# EAGLE board untitled (EAGLE 9.6.2)
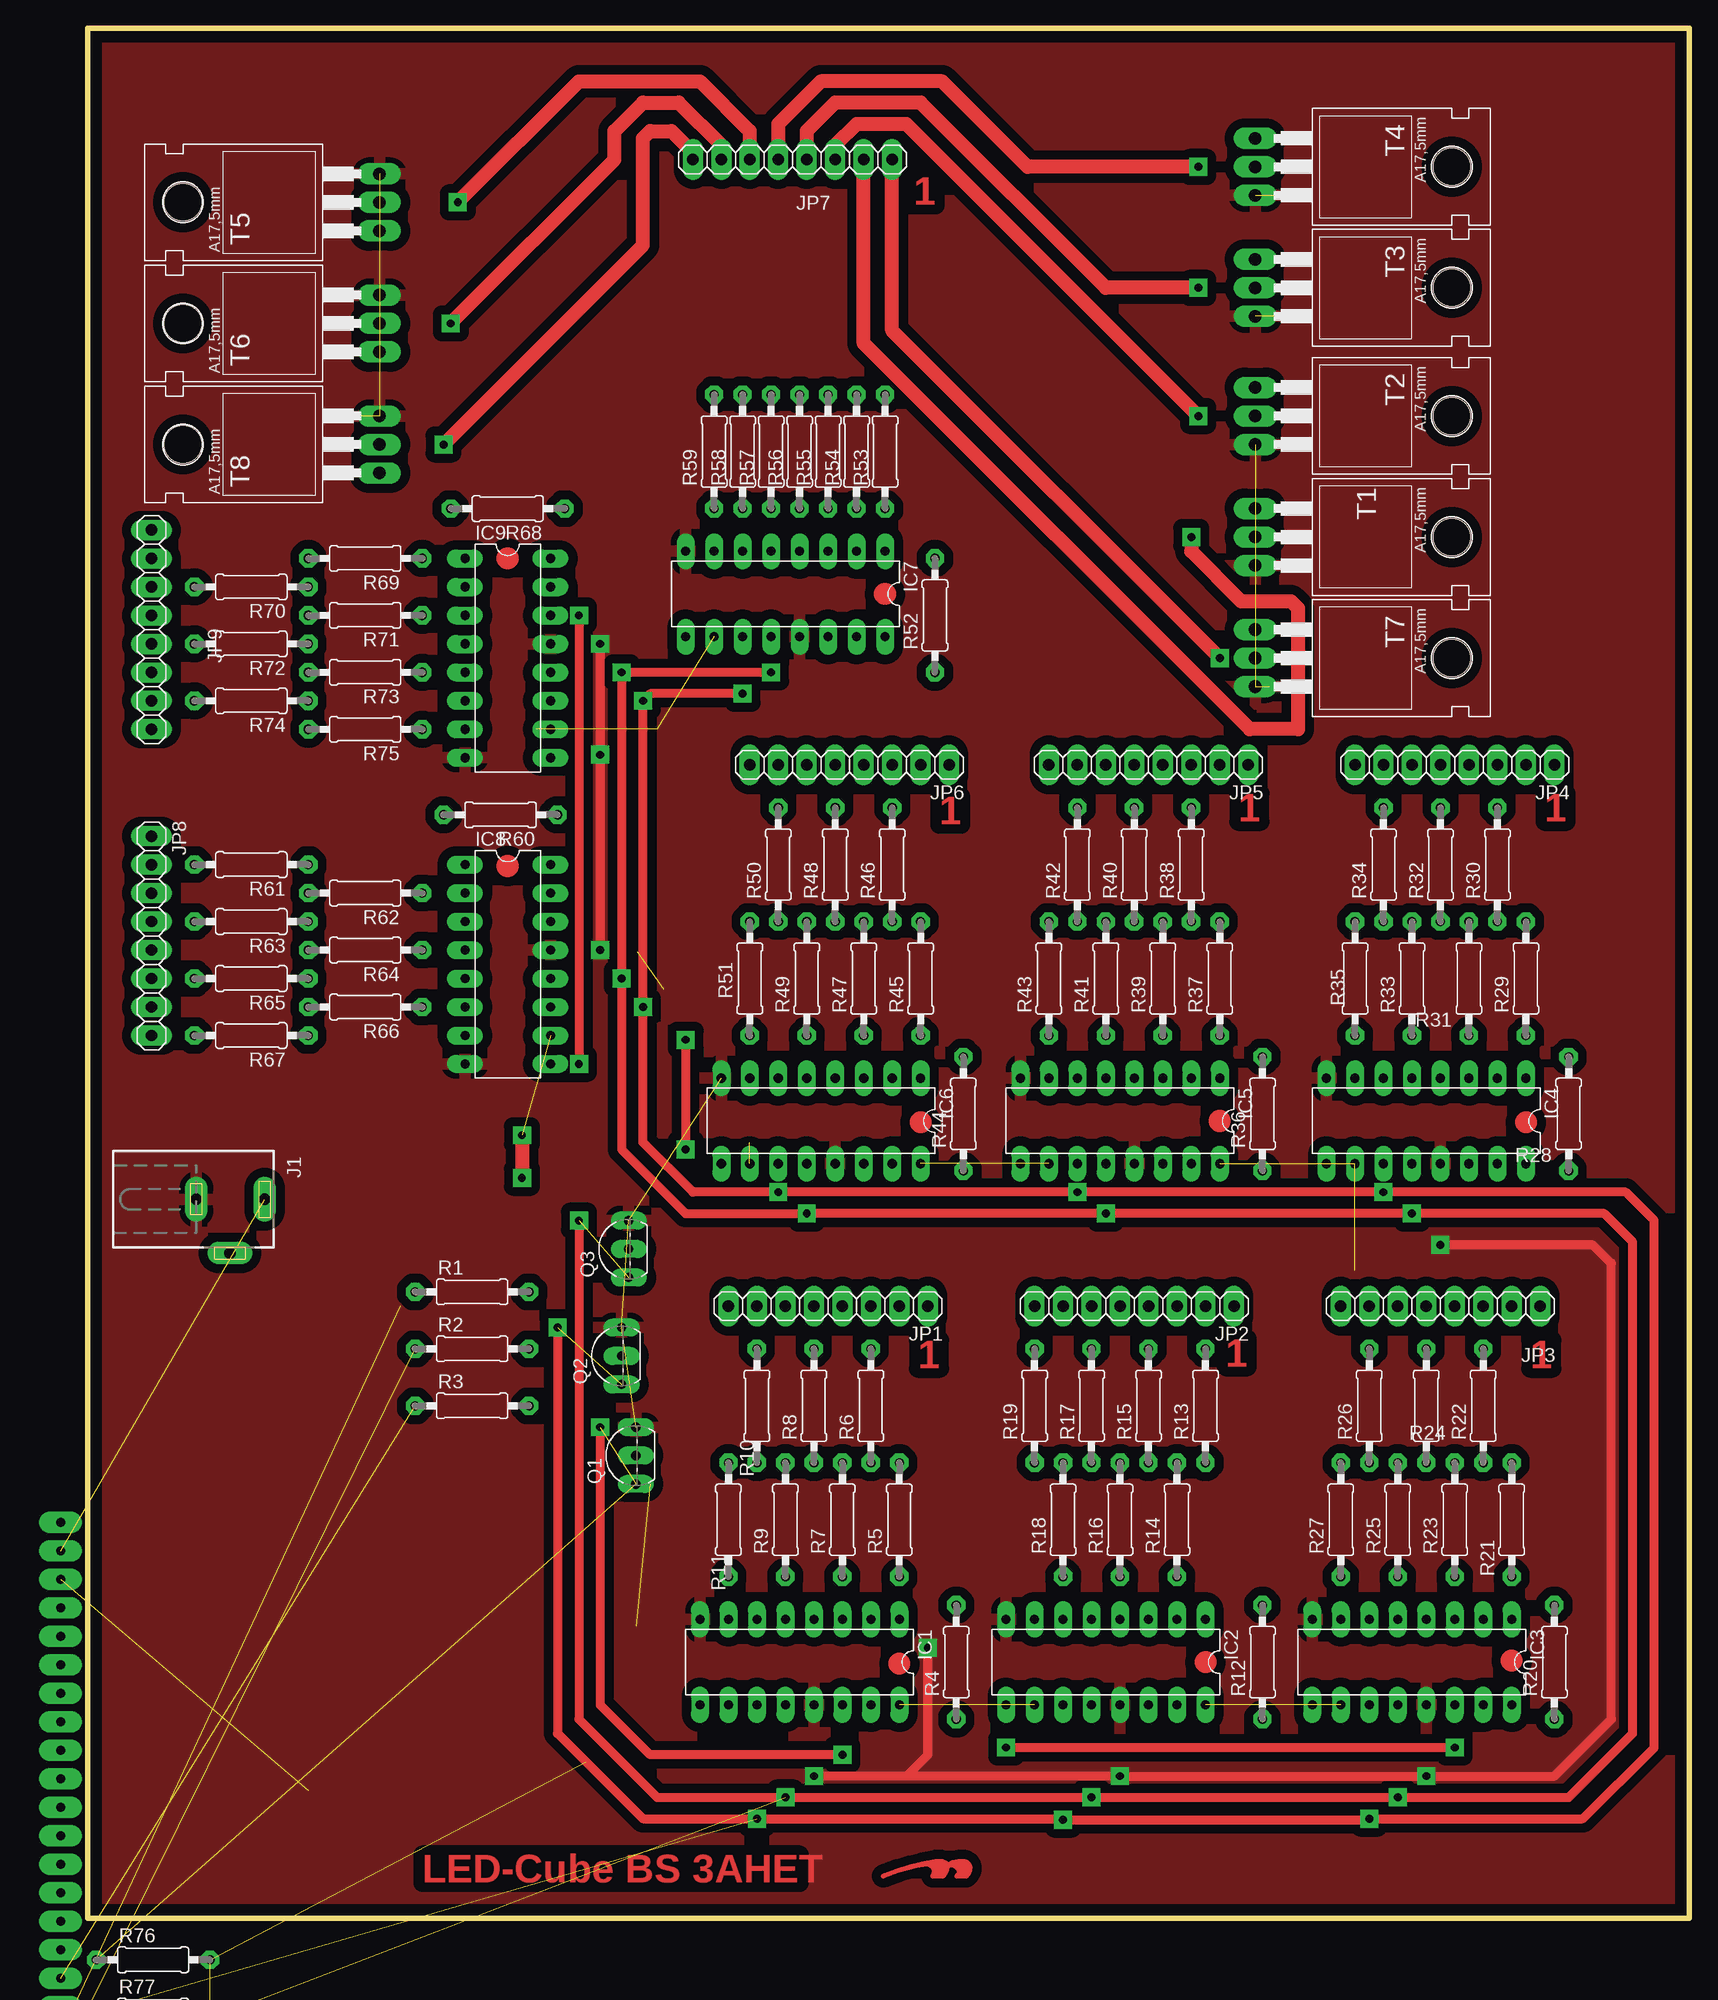
[diagram p0: board, top side]
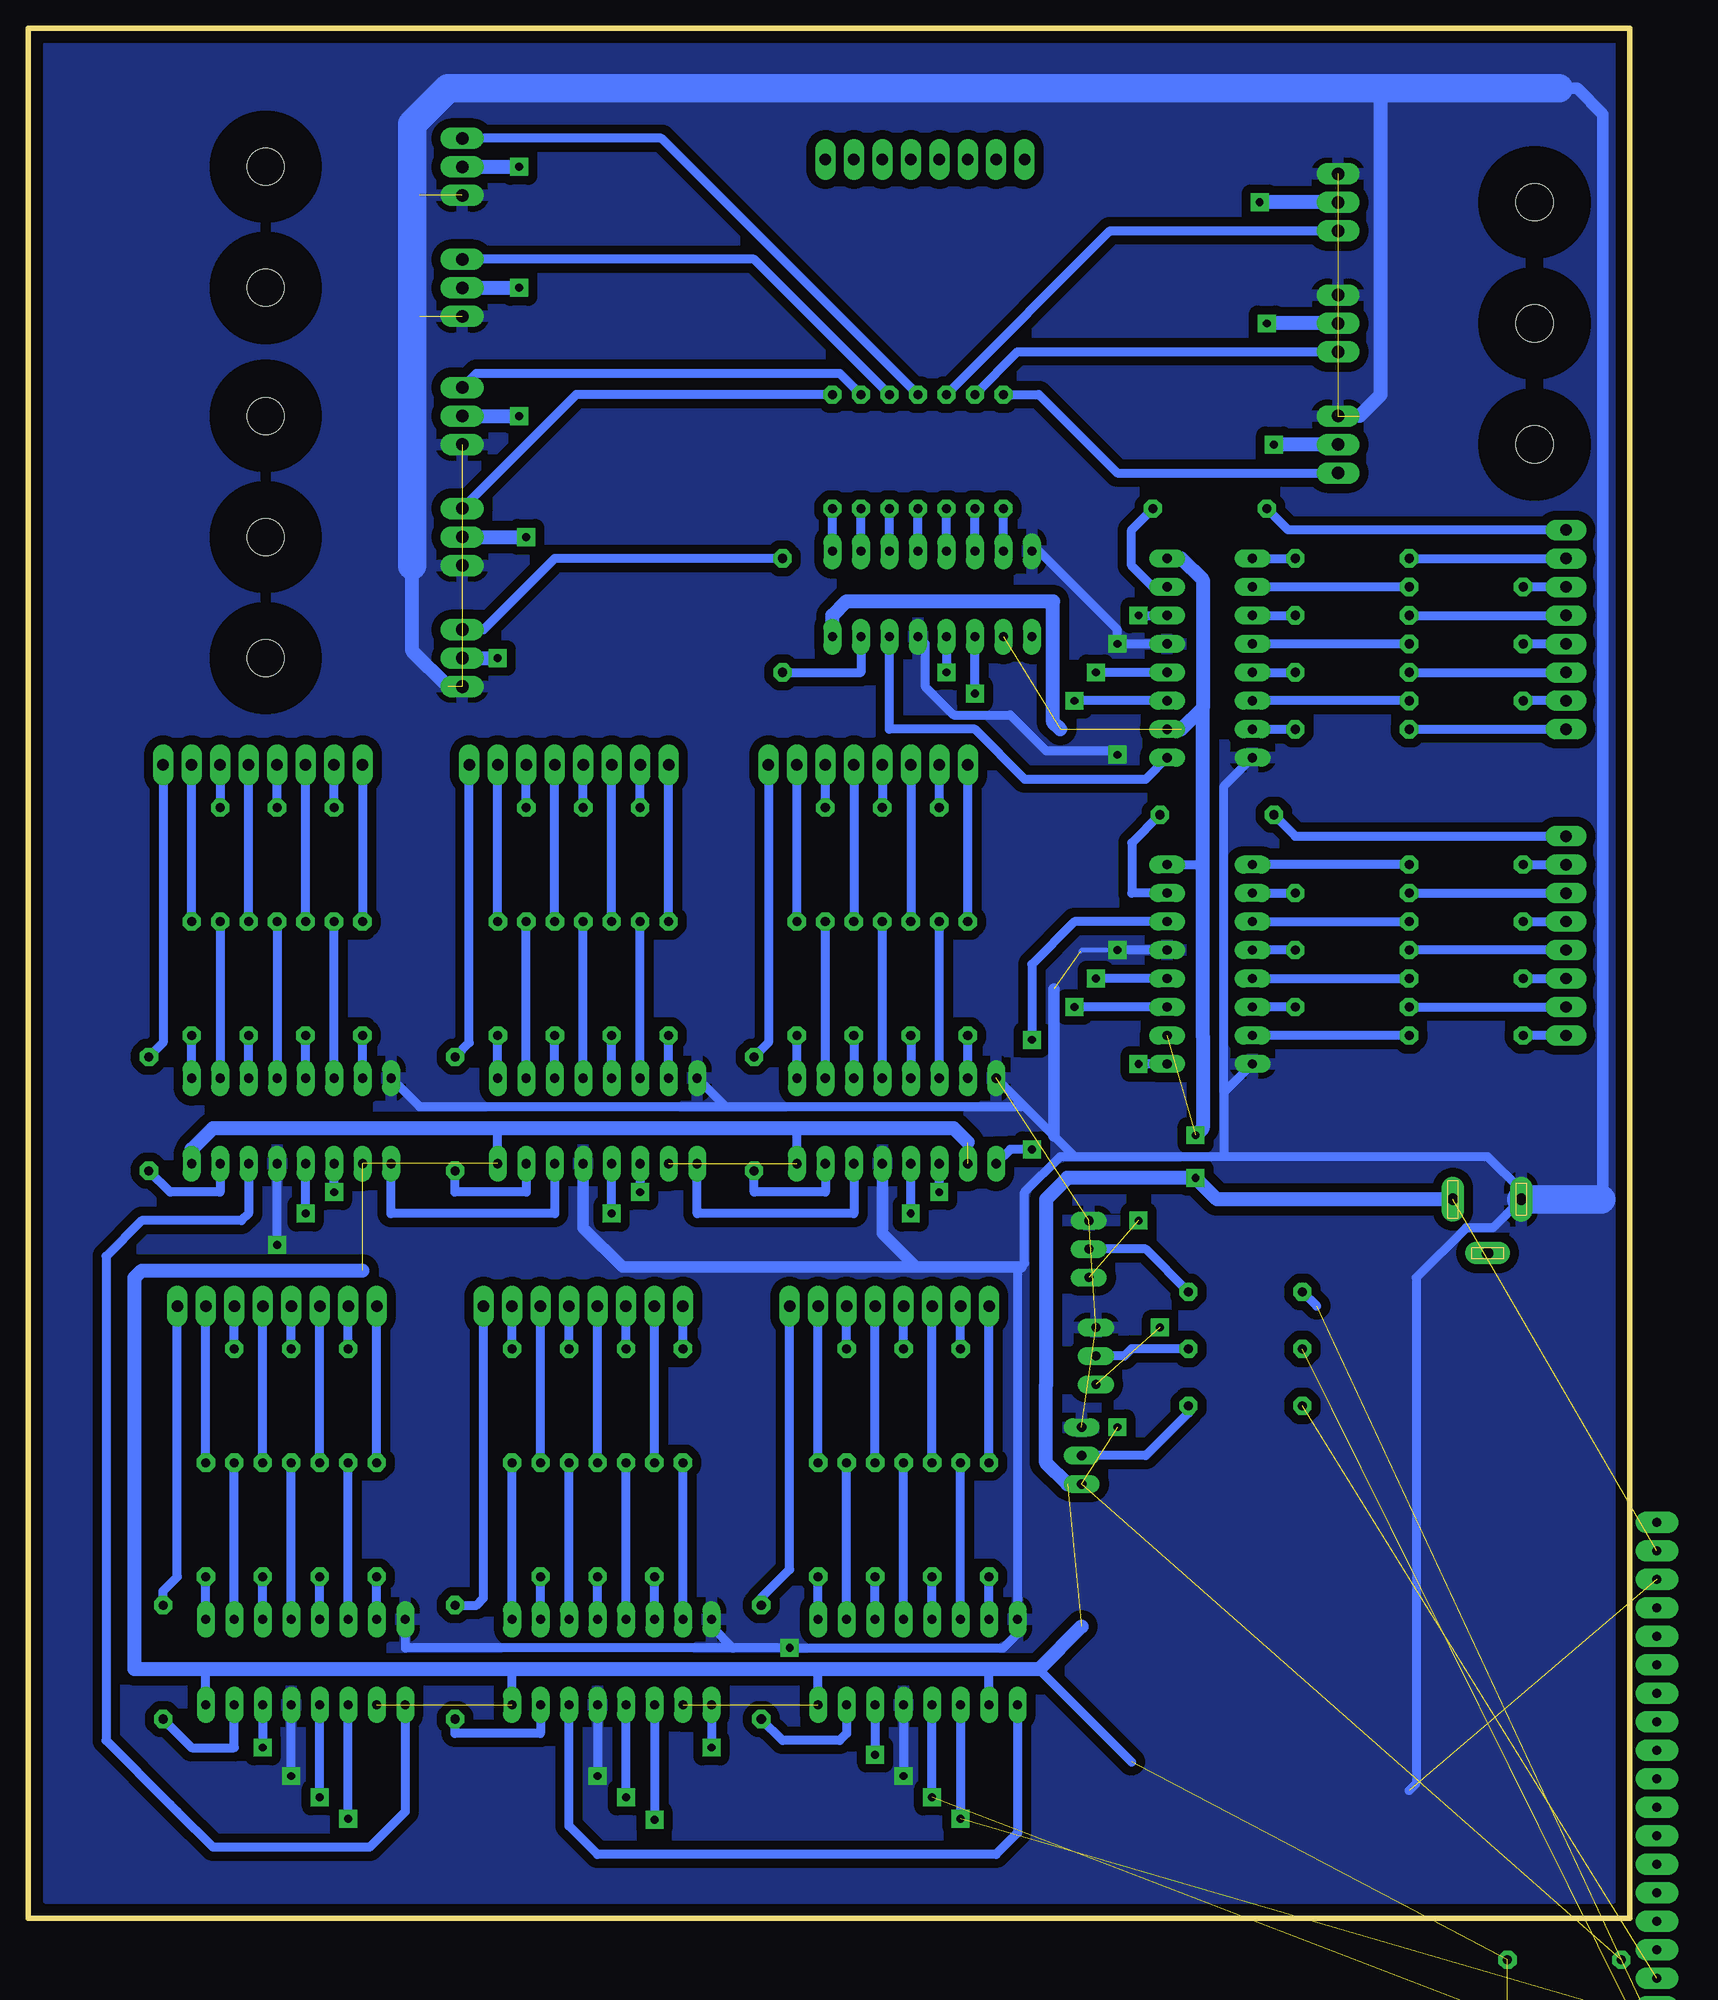
[diagram p1: board, bottom side, seen from below]

Size 142.85 x 168.58 mm. Coordinates in mm from the lower left corner, seen from the top.
Outline: 0,0 142.85,0 142.85,168.58 0,168.58 0,0
Copper layers (1*16): Top 0.035mm / dielectric 1.5mm / Bottom 0.035mm
Design rules "htl-klu": minimum track width 16mil, minimum drill 0.35mm, track to track 16mil, track to pad 16mil, pad to pad 16mil, via to via 16mil, smd to smd 6mil, copper to edge 40mil, drill to drill 6mil, minimum pad ring 16mil, minimum via ring 8mil, stop-mask expansion 4mil, vias tented up to drill 0mil, thermal gap 20mil

## Footprints (pad centres in the part's own frame; a part is rotated, then mirrored left to right if it is on the bottom)
DIL16 = drill 0.813 long: 1 -8.89,-3.81; 2 -6.35,-3.81; 3 -3.81,-3.81; 4 -1.27,-3.81; 5 1.27,-3.81; 6 3.81,-3.81; 7 6.35,-3.81; 8 8.89,-3.81; 9 8.89,3.81; 10 6.35,3.81; 11 3.81,3.81; 12 1.27,3.81; 13 -1.27,3.81; 14 -3.81,3.81; 15 -6.35,3.81; 16 -8.89,3.81
DCJ0202 = drill 1 pad 2 long: 1 0,3.1; 2 4.8,0; 3 0,-3
1X08 = drill 1.016 long: 1 -8.89,0; 2 -6.35,0; 3 -3.81,0; 4 -1.27,0; 5 1.27,0; 6 3.81,0; 7 6.35,0; 8 8.89,0
TO92-EBC = drill 0.813 long: B 0,-1.27; C -2.54,-1.27; E 2.54,-1.27
0207/10 = drill 0.813 octagon: 1 -5.08,0; 2 5.08,0
TO220 = drill 1.118 long: 1 -2.54,-6.35; 2 0,-6.35; 3 2.54,-6.35 | hole 3.302: 0,11.176
PI_PICO = drill 0.8 pad 1.93 long: 3V3(OUT) 10.16,15.24; 3V3_EN 10.16,17.78; ADC 10.16,12.7; GND1 -10.16,20.32; GND2 -10.16,7.62; GND3 -10.16,-5.08; GND4 -10.16,-17.78; GND5 10.16,-17.78; GND6 10.16,-5.08; GND7 10.16,7.62; GND8 10.16,20.32; GP0 -10.16,25.4; GP1 -10.16,22.86; GP2 -10.16,17.78; GP3 -10.16,15.24; GP4 -10.16,12.7; GP5 -10.16,10.16; GP6 -10.16,5.08; GP7 -10.16,2.54; GP8 -10.16,0; GP9 -10.16,-2.54; GP10 -10.16,-7.62; GP11 -10.16,-10.16; GP12 -10.16,-12.7; GP13 -10.16,-15.24; GP14 -10.16,-20.32; GP15 -10.16,-22.86; GP16 10.16,-22.86; GP17 10.16,-20.32; GP18 10.16,-15.24; GP19 10.16,-12.7; GP20 10.16,-10.16; GP21 10.16,-7.62; GP22 10.16,-2.54; GP26 10.16,2.54; GP27 10.16,5.08; GP28 10.16,10.16; RUN 10.16,0; VBUS 10.16,25.4; VSYS 10.16,22.86

## Placement (x,y rotation side)
IC1  74HC595N  [DIL16]  63.5,22.86 180 top
IC2  74HC595N  [DIL16]  90.81,22.86 180 top
IC3  74HC595N  [DIL16]  118.11,22.86 180 top
IC4  74HC595N  [DIL16]  119.38,71.12 180 top
IC5  74HC595N  [DIL16]  92.08,71.12 180 top
IC6  74HC595N  [DIL16]  65.41,71.12 180 top
IC7  74HC595N  [DIL16]  62.23,118.11 180 top
IC8  74HC595N  [DIL16]  37.47,85.09 270 top
IC9  74HC595N  [DIL16]  37.47,112.39 270 top
J1  DCJ0202  [DCJ0202]  12.7,64.14 270 top
JP1  [1X08]  66.04,54.61 180 top
JP2  [1X08]  93.34,54.61 180 top
JP3  [1X08]  120.65,54.61 180 top
JP4  [1X08]  121.92,102.87 180 top
JP5  [1X08]  94.61,102.87 180 top
JP6  [1X08]  67.94,102.87 180 top
JP7  [1X08]  62.87,156.84 180 top
JP8  [1X08]  5.71,87.63 270 top
JP9  [1X08]  5.71,114.94 270 top
Q1  BC447  [TO92-EBC]  47.62,41.27 90 top
Q2  BC447  [TO92-EBC]  46.35,50.16 90 top
Q3  BC447  [TO92-EBC]  46.99,59.69 90 top
R1  [0207/10]  34.29,55.88 0 top
R2  [0207/10]  34.29,50.8 0 top
R3  [0207/10]  34.29,45.72 0 top
R4  [0207/10]  77.47,22.86 90 top
R5  [0207/10]  72.39,35.56 90 top
R6  [0207/10]  69.85,45.72 90 top
R7  [0207/10]  67.31,35.56 90 top
R8  [0207/10]  64.77,45.72 90 top
R9  [0207/10]  62.23,35.56 90 top
R10  [0207/10]  59.69,45.72 90 top
R11  [0207/10]  57.15,35.56 90 top
R12  [0207/10]  104.78,22.86 90 top
R13  [0207/10]  99.69,45.72 90 top
R14  [0207/10]  97.16,35.56 90 top
R15  [0207/10]  94.61,45.72 90 top
R16  [0207/10]  92.08,35.56 90 top
R17  [0207/10]  89.53,45.72 90 top
R18  [0207/10]  87,35.56 90 top
R19  [0207/10]  84.45,45.72 90 top
R20  [0207/10]  130.81,22.86 90 top
R21  [0207/10]  127,35.56 90 top
R22  [0207/10]  124.46,45.72 90 top
R23  [0207/10]  121.92,35.56 90 top
R24  [0207/10]  119.38,45.72 90 top
R25  [0207/10]  116.84,35.56 90 top
R26  [0207/10]  114.3,45.72 90 top
R27  [0207/10]  111.76,35.56 90 top
R28  [0207/10]  132.08,71.75 90 top
R29  [0207/10]  128.27,83.82 90 top
R30  [0207/10]  125.73,93.98 90 top
R31  [0207/10]  123.19,83.82 90 top
R32  [0207/10]  120.65,93.98 90 top
R33  [0207/10]  118.11,83.82 90 top
R34  [0207/10]  115.57,93.98 90 top
R35  [0207/10]  113.03,83.82 90 top
R36  [0207/10]  104.78,71.75 90 top
R37  [0207/10]  100.97,83.82 90 top
R38  [0207/10]  98.42,93.98 90 top
R39  [0207/10]  95.89,83.82 90 top
R40  [0207/10]  93.34,93.98 90 top
R41  [0207/10]  90.81,83.82 90 top
R42  [0207/10]  88.27,93.98 90 top
R43  [0207/10]  85.72,83.82 90 top
R44  [0207/10]  78.11,71.75 90 top
R45  [0207/10]  74.3,83.82 90 top
R46  [0207/10]  71.75,93.98 90 top
R47  [0207/10]  69.22,83.82 90 top
R48  [0207/10]  66.67,93.98 90 top
R49  [0207/10]  64.14,83.82 90 top
R50  [0207/10]  61.59,93.98 90 top
R51  [0207/10]  59.05,83.82 90 top
R52  [0207/10]  75.56,116.2 90 top
R53  [0207/10]  71.12,130.81 90 top
R54  [0207/10]  68.58,130.81 90 top
R55  [0207/10]  66.04,130.81 90 top
R56  [0207/10]  63.5,130.81 90 top
R57  [0207/10]  60.96,130.81 90 top
R58  [0207/10]  58.42,130.81 90 top
R59  [0207/10]  55.88,130.81 90 top
R60  [0207/10]  36.83,98.42 180 top
R61  [0207/10]  14.61,93.98 180 top
R62  [0207/10]  24.77,91.44 180 top
R63  [0207/10]  14.61,88.9 180 top
R64  [0207/10]  24.77,86.36 180 top
R65  [0207/10]  14.61,83.82 180 top
R66  [0207/10]  24.77,81.28 180 top
R67  [0207/10]  14.61,78.74 180 top
R68  [0207/10]  37.47,125.73 180 top
R69  [0207/10]  24.77,121.28 180 top
R70  [0207/10]  14.61,118.75 180 top
R71  [0207/10]  24.77,116.2 180 top
R72  [0207/10]  14.61,113.67 180 top
R73  [0207/10]  24.77,111.12 180 top
R74  [0207/10]  14.61,108.58 180 top
R75  [0207/10]  24.77,106.05 180 top
R76  [0207/10]  5.84,-3.68 0 top  (outside the outline)
R77  [0207/10]  5.84,-8.26 0 top  (outside the outline)
R78  [0207/10]  5.84,-12.83 0 top  (outside the outline)
T1  TIP122  [TO220]  110.49,123.19 270 top
T2  TIP122  [TO220]  110.49,133.99 270 top
T3  TIP122  [TO220]  110.49,145.41 270 top
T4  TIP122  [TO220]  110.49,156.21 270 top
T5  TIP122  [TO220]  19.68,153.03 90 top
T6  TIP122  [TO220]  19.68,142.24 90 top
T7  TIP122  [TO220]  110.49,112.39 270 top
T8  TIP122  [TO220]  19.68,131.44 90 top
U$1  [LOGOTOP_8]  76.2,3.81 0 top
U$2  [PI_PICO]  -12.57,9.91 0 top

## Library data of the parts
IC1-IC9 = 74xx-eu
J1 = con-jack; OC_FARNELL: unknown; OC_NEWARK: unknown
JP1-JP9 = pinhead
Q1-Q3 = transistor-npn
R1-R78 = rcl; SPICEPREFIX: R
T1-T8 = transistor
U$1 = HTL-Logo
U$2 = PI_PICO

## Nets
DATA: IC1.14 Q1.C R76.1
GND: IC1.8 IC1.13 IC2.8 IC2.13 IC3.8 IC3.13 IC4.8 IC4.13 IC5.8 IC5.13 IC6.8 IC6.13 IC7.8 IC7.13 IC8.8 IC8.13 IC9.8 IC9.13 J1.3 Q1.E Q2.E Q3.E T1.3 T2.3 T3.3 T4.3 T5.3 T6.3 T7.3 T8.3 U$2.GND8
N$1: R1.1 U$2.GP17
N$2: Q3.B R1.2
N$4: Q2.B R2.2
N$5: Q1.B R3.2
N$6: R3.1 U$2.GP18
N$7: R2.1 U$2.GP16
N$8: IC1.15 R4.1
N$9: IC1.5 R9.1
N$10: IC1.6 R10.1
N$11: IC1.7 R11.1
N$12: JP1.1 R4.2
N$13: JP1.2 R5.2
N$14: IC1.1 R5.1
N$15: IC1.2 R6.1
N$16: IC1.3 R7.1
N$17: IC1.4 R8.1
N$18: JP1.3 R6.2
N$19: JP1.4 R7.2
N$20: JP1.5 R8.2
N$21: JP1.6 R9.2
N$22: JP1.7 R10.2
N$23: JP1.8 R11.2
N$24: IC2.1 R13.1
N$25: IC2.2 R14.1
N$26: IC2.3 R15.1
N$27: IC2.4 R16.1
N$28: IC1.9 IC2.14
N$29: IC2.15 R12.1
N$30: IC2.5 R17.1
N$31: IC2.6 R18.1
N$32: IC2.7 R19.1
N$33: JP2.1 R12.2
N$34: JP2.2 R13.2
N$35: JP2.3 R14.2
N$36: JP2.4 R15.2
N$37: JP2.5 R16.2
N$38: JP2.6 R17.2
N$39: JP2.7 R18.2
N$40: JP2.8 R19.2
N$42: IC2.9 IC3.14
N$44: IC3.1 R21.1
N$45: IC3.2 R22.1
N$46: IC3.3 R23.1
N$47: IC3.4 R24.1
N$48: IC3.15 R20.1
N$49: IC3.5 R25.1
N$50: IC3.6 R26.1
N$51: IC3.7 R27.1
N$52: JP3.1 R20.2
N$53: JP3.2 R21.2
N$54: JP3.3 R22.2
N$55: JP3.4 R23.2
N$56: JP3.5 R24.2
N$57: JP3.6 R25.2
N$58: JP3.7 R26.2
N$59: JP3.8 R27.2
N$60: IC7.15 R52.1
N$61: IC3.9 IC4.14
N$62: IC7.1 R53.1
N$63: IC4.1 R29.1
N$64: IC4.2 R30.1
N$65: IC4.3 R31.1
N$66: IC4.4 R32.1
N$67: IC4.15 R28.1
N$68: IC4.5 R33.1
N$69: IC4.6 R34.1
N$70: IC4.7 R35.1
N$71: JP4.1 R28.2
N$72: JP4.2 R29.2
N$73: JP4.3 R30.2
N$74: JP4.4 R31.2
N$75: JP4.5 R32.2
N$76: JP4.6 R33.2
N$77: JP4.7 R34.2
N$78: JP4.8 R35.2
N$79: IC7.2 R54.1
N$80: IC4.9 IC5.14
N$81: IC7.3 R55.1
N$82: IC5.1 R37.1
N$83: IC5.2 R38.1
N$84: IC5.3 R39.1
N$85: IC5.4 R40.1
N$86: IC5.15 R36.1
N$87: IC5.5 R41.1
N$88: IC5.6 R42.1
N$89: IC5.7 R43.1
N$90: JP5.1 R36.2
N$91: JP5.2 R37.2
N$92: JP5.3 R38.2
N$93: JP5.4 R39.2
N$94: JP5.5 R40.2
N$95: JP5.6 R41.2
N$96: JP5.7 R42.2
N$97: JP5.8 R43.2
N$98: IC7.4 R56.1
N$99: IC5.9 IC6.14
N$100: IC7.5 R57.1
N$101: IC6.1 R45.1
N$102: IC6.2 R46.1
N$103: IC6.3 R47.1
N$104: IC6.4 R48.1
N$105: IC6.15 R44.1
N$106: IC6.5 R49.1
N$107: IC6.6 R50.1
N$108: IC6.7 R51.1
N$109: JP6.1 R44.2
N$110: JP6.2 R45.2
N$111: JP6.3 R46.2
N$112: JP6.4 R47.2
N$113: JP6.5 R48.2
N$114: JP6.6 R49.2
N$115: JP6.7 R50.2
N$116: JP6.8 R51.2
N$117: IC7.6 R58.1
N$119: IC7.7 R59.1
N$120: R52.2 T7.1
N$121: R53.2 T1.1
N$122: R54.2 T2.1
N$123: R55.2 T3.1
N$124: R56.2 T4.1
N$125: R57.2 T5.1
N$126: R58.2 T6.1
N$127: R59.2 T8.1
N$128: JP7.1 T7.2
N$129: JP7.2 T1.2
N$130: JP7.3 T2.2
N$131: JP7.4 T3.2
N$132: JP7.5 T4.2
N$133: JP7.6 T5.2
N$134: JP7.7 T6.2
N$135: JP7.8 T8.2
N$136: IC6.9 IC8.14
N$137: IC8.1 R61.1
N$138: IC8.2 R62.1
N$139: IC8.3 R63.1
N$140: IC8.4 R64.1
N$141: IC8.15 R60.1
N$142: IC8.5 R65.1
N$143: IC8.6 R66.1
N$144: IC8.7 R67.1
N$145: JP8.1 R60.2
N$146: JP8.2 R61.2
N$147: JP8.3 R62.2
N$148: JP8.4 R63.2
N$149: JP8.5 R64.2
N$150: JP8.6 R65.2
N$151: JP8.7 R66.2
N$152: JP8.8 R67.2
N$154: IC8.9 IC9.14
N$155: IC9.1 R69.1
N$156: IC9.2 R70.1
N$157: IC9.3 R71.1
N$158: IC9.4 R72.1
N$159: IC9.15 R68.1
N$160: IC9.5 R73.1
N$161: IC9.6 R74.1
N$162: IC9.7 R75.1
N$163: JP9.1 R68.2
N$164: JP9.2 R69.2
N$165: JP9.3 R70.2
N$166: JP9.4 R71.2
N$167: JP9.5 R72.2
N$168: JP9.6 R73.2
N$169: JP9.7 R74.2
N$170: JP9.8 R75.2
N$173: IC7.14 IC9.9
SHIFT: IC1.11 IC2.11 IC3.11 IC4.11 IC5.11 IC6.11 IC7.11 IC8.11 IC9.11 Q2.C R77.1
STORE: IC1.12 IC2.12 IC3.12 IC4.12 IC5.12 IC6.12 IC7.12 IC8.12 IC9.12 Q3.C R78.1
VCC: IC1.10 IC1.16 IC2.10 IC2.16 IC3.10 IC3.16 IC4.10 IC4.16 IC5.10 IC5.16 IC6.10 IC6.16 IC7.10 IC7.16 IC8.10 IC8.16 IC9.10 IC9.16 J1.1 R76.2 R77.2 R78.2 U$2.VSYS

## Tracks (layer width: path | path; a pad name or v marks a point on that pad's centre or on a via)
DATA  (via drill 0.7 pad 1.6)  (2 unrouted)
  Top 0.813: v67.31,14.61 50.16,14.61 45.72,19.05 v45.72,43.81
  Bottom 0.813: IC1.14 v67.31,14.61
GND  (via drill 0.7 pad 1.6)  (13 unrouted)
  Top 0.813: 73.03,12.7 v92.08,12.7 v119.38,12.7 130.81,12.7 135.89,17.78 135.89,58.42 134.25,60.06 v120.65,60.06 | 73.03,12.7 v64.77,12.7 | 73.03,12.7 74.93,14.61 v74.93,24.13 | v45.72,113.67 v45.72,103.77 v45.72,86.36
  Bottom 0.406: v45.72,86.36 48.9,86.36 49.02,86.23
  Bottom 0.813: 19.68,11.43 19.05,12.06 19.05,57.15 14.61,61.59 12.24,61.59 J1.3 9.7,64.94 12.7,67.94 36.2,67.94 | 49.53,67.94 50.8,67.94 53.98,64.77 53.98,58.42 54.29,58.1 54.61,57.78 IC1.8 54.61,25.4 55.88,24.13 v74.93,24.13 80.01,24.13 | 49.53,67.94 36.2,67.94 | 80.01,24.13 109.22,24.13 IC3.8 | IC2.8 81.92,26.04 80.01,24.13 | IC1.13 v64.77,12.7 | IC2.13 v92.08,12.7 | v119.38,12.7 IC3.13 | v120.65,60.06 IC4.13 | IC4.8 107.95,72.39 80.64,72.39 | 80.64,72.39 53.98,72.39 | 53.98,72.39 51.37,69.79 49.53,67.94 | IC6.8 53.98,72.39 | IC5.8 80.64,72.39 | IC9.13 v45.72,113.67 45.72,114.94 52.7,121.92 IC7.8 | 36.2,73.66 36.2,100.97 IC9.8 | 36.2,73.66 36.2,67.94 | IC8.8 36.2,73.66 | IC8.13 v45.72,86.36 | IC7.13 62.87,113.67 62.87,109.86 60.33,107.31 55.24,107.31 52.07,104.14 45.72,104.14 v45.72,103.77
  Bottom 1.016: IC6.13 66.67,61.09 63.69,58.1 | 63.69,58.1 54.29,58.1 | IC5.13 93.34,61.59 89.85,58.1 63.69,58.1 | 51.37,82.89 51.37,69.79 | 6.35,163.19 4.7,163.19 2.41,160.91 2.41,64.26 2.54,64.14
  Bottom 1.27: 24.13,133.99 22.23,135.89 22.23,144.78 22.23,155.57 22.23,163.19 | 105.41,109.86 108.58,113.03 108.58,120.65 | 107.95,142.88 108.58,143.51 | 107.95,153.67 108.58,154.31
  Bottom 2.54: 2.54,64.14 J1.3 | 6.35,163.19 22.23,163.19 105.41,163.19 108.58,160.02 108.58,154.31 108.58,143.51 108.58,131.44 108.58,120.65
  pour Top (isolate 0.813): 1.27,167.26 141.48,167.26 141.48,1.65 141.6,1.52 1.27,1.52
  pour Bottom (isolate 0.813): 1.78,166.88 141.1,166.88 141.1,1.78 1.65,1.78 1.65,166.88
N$1  (1 unrouted)
  Bottom 0.813: 27.94,54.61 R1.1
N$2
  Bottom 0.813: R1.2 43.18,59.69 Q3.B
N$4
  Bottom 0.813: R2.2 44.45,50.8 45.09,50.16 Q2.B
N$5
  Bottom 0.813: R3.2 39.37,45.09 43.18,41.27 Q1.B
N$6  (1 unrouted)
N$7  (1 unrouted)
N$8
  Bottom 0.813: IC1.15 69.85,16.51 70.48,15.88 75.56,15.88 R4.1
N$9
  Bottom 0.813: IC1.5 R9.1
N$10
  Bottom 0.813: IC1.6 R10.1
N$11
  Bottom 0.813: IC1.7 R11.1
N$12
  Bottom 0.813: R4.2 77.47,28.57 74.93,31.11 JP1.1
N$13
  Bottom 0.813: R5.2 JP1.2
N$14
  Bottom 0.813: IC1.1 R5.1
N$15
  Bottom 0.813: IC1.2 R6.1
N$16
  Bottom 0.813: IC1.3 R7.1
N$17
  Bottom 0.813: IC1.4 R8.1
N$18
  Bottom 0.813: R6.2 JP1.3
N$19
  Bottom 0.813: R7.2 JP1.4
N$20
  Bottom 0.813: R8.2 JP1.5
N$21
  Bottom 0.813: R9.2 JP1.6
N$22
  Bottom 0.813: R10.2 JP1.7
N$23
  Bottom 0.813: R11.2 JP1.8
N$24
  Bottom 0.813: IC2.1 R13.1
N$25
  Bottom 0.813: IC2.2 R14.1
N$26
  Bottom 0.813: IC2.3 R15.1
N$27
  Bottom 0.813: IC2.4 R16.1
N$28
  Bottom 0.813: IC1.9 54.61,7.62 56.52,5.71 92.08,5.71 94.61,8.26 IC2.14
N$29
  Bottom 0.813: IC2.15 97.16,16.51 104.78,16.51 R12.1
N$30
  Bottom 0.813: IC2.5 R17.1
N$31
  Bottom 0.813: IC2.6 R18.1
N$32
  Bottom 0.813: IC2.7 R19.1
N$33
  Bottom 0.813: R12.2 102.87,27.94 102.23,28.57 JP2.1
N$34
  Bottom 0.813: R13.2 JP2.2
N$35
  Bottom 0.813: R14.2 JP2.3
N$36
  Bottom 0.813: R15.2 JP2.4
N$37
  Bottom 0.813: R16.2 JP2.5
N$38
  Bottom 0.813: R17.2 JP2.6
N$39
  Bottom 0.813: R18.2 JP2.7
N$40
  Bottom 0.813: R19.2 JP2.8
N$42  (via drill 0.7 pad 1.6)
  Top 0.813: v121.92,15.24 v81.92,15.24
  Bottom 0.813: IC2.9 v81.92,15.24 | IC3.14 v121.92,15.24
N$44
  Bottom 0.813: IC3.1 R21.1
N$45
  Bottom 0.813: IC3.2 R22.1
N$46
  Bottom 0.813: IC3.3 R23.1
N$47
  Bottom 0.813: IC3.4 R24.1
N$48
  Bottom 0.813: R20.1 128.27,15.24 124.46,15.24 IC3.15
N$49
  Bottom 0.813: IC3.5 R25.1
N$50
  Bottom 0.813: IC3.6 R26.1
N$51
  Bottom 0.813: IC3.7 R27.1
N$52
  Bottom 0.813: R20.2 130.81,29.21 129.54,30.48 JP3.1
N$53
  Bottom 0.813: R21.2 JP3.2
N$54
  Bottom 0.813: R22.2 JP3.3
N$55
  Bottom 0.813: R23.2 JP3.4
N$56
  Bottom 0.813: R24.2 JP3.5
N$57
  Bottom 0.813: R25.2 JP3.6
N$58
  Bottom 0.813: R26.2 JP3.7
N$59
  Bottom 0.813: R27.2 JP3.8
N$60
  Bottom 0.813: IC7.15 68.58,111.12 R52.1
N$61
  Bottom 0.813: IC3.9 109.22,9.53 112.39,6.35 126.36,6.35 129.54,9.53 130.18,10.16 135.89,15.88 135.89,59.05 132.72,62.23 123.83,62.23 123.19,62.87 IC4.14
N$62
  Bottom 0.813: IC7.1 R53.1
N$63
  Bottom 0.813: IC4.1 R29.1
N$64
  Bottom 0.813: R30.1 IC4.2
N$65
  Bottom 0.813: IC4.3 R31.1
N$66
  Bottom 0.813: R32.1 IC4.4
N$67
  Bottom 0.813: IC4.15 125.73,64.77 130.18,64.77 R28.1
N$68
  Bottom 0.813: IC4.5 R33.1
N$69
  Bottom 0.813: IC4.6 R34.1
N$70
  Bottom 0.813: IC4.7 R35.1
N$71
  Bottom 0.813: R28.2 130.81,78.11 JP4.1
N$72
  Bottom 0.813: R29.2 JP4.2
N$73
  Bottom 0.813: JP4.3 R30.2
N$74
  Bottom 0.813: R31.2 JP4.4
N$75
  Bottom 0.813: R32.2 JP4.5
N$76
  Bottom 0.813: R33.2 JP4.6
N$77
  Bottom 0.813: R34.2 JP4.7
N$78
  Bottom 0.813: JP4.8 R35.2
N$79
  Bottom 0.813: IC7.2 R54.1
N$80
  Bottom 0.813: IC5.14 95.89,62.87 110.49,62.87 IC4.9
N$81
  Bottom 0.813: IC7.3 R55.1
N$82
  Bottom 0.813: IC5.1 R37.1
N$83
  Bottom 0.813: IC5.2 R38.1
N$84
  Bottom 0.813: IC5.3 R39.1
N$85
  Bottom 0.813: IC5.4 R40.1
N$86
  Bottom 0.813: IC5.15 98.42,64.77 104.78,64.77 R36.1
N$87
  Bottom 0.813: IC5.5 R41.1
N$88
  Bottom 0.813: IC5.6 R42.1
N$89
  Bottom 0.813: IC5.7 R43.1
N$90
  Bottom 0.813: R36.2 103.5,78.11 JP5.1
N$91
  Bottom 0.813: R37.2 JP5.2
N$92
  Bottom 0.813: R38.2 JP5.3
N$93
  Bottom 0.813: R39.2 JP5.4
N$94
  Bottom 0.813: R40.2 JP5.5
N$95
  Bottom 0.813: R41.2 JP5.6
N$96
  Bottom 0.813: R42.2 JP5.7
N$97
  Bottom 0.813: R43.2 JP5.8
N$98
  Bottom 0.813: IC7.4 R56.1
N$99
  Bottom 0.813: IC6.14 69.22,62.87 83.19,62.87 IC5.9
N$100
  Bottom 0.813: IC7.5 R57.1
N$101
  Bottom 0.813: IC6.1 R45.1
N$102
  Bottom 0.813: IC6.2 R46.1
N$103
  Bottom 0.813: R47.1 IC6.3
N$104
  Bottom 0.813: IC6.4 R48.1
N$105
  Bottom 0.813: IC6.15 71.75,64.77 78.11,64.77 R44.1
N$106
  Bottom 0.813: R49.1 IC6.5
N$107
  Bottom 0.813: IC6.6 R50.1
N$108
  Bottom 0.813: IC6.7 R51.1
N$109
  Bottom 0.813: JP6.1 76.83,78.11 R44.2
N$110
  Bottom 0.813: R45.2 JP6.2
N$111
  Bottom 0.813: R46.2 JP6.3
N$112
  Bottom 0.813: JP6.4 R47.2
N$113
  Bottom 0.813: JP6.5 R48.2
N$114
  Bottom 0.813: JP6.6 R49.2
N$115
  Bottom 0.813: R50.2 JP6.7
N$116
  Bottom 0.813: R51.2 JP6.8
N$117
  Bottom 0.813: IC7.6 R58.1
N$119
  Bottom 0.813: IC7.7 R59.1
N$120
  Bottom 0.813: R52.2 95.89,121.28 102.23,114.94 T7.1
N$121
  Bottom 0.813: R53.2 93.98,135.89 T1.1
N$122
  Bottom 0.813: R54.2 70.48,137.79 102.87,137.79 T2.1
N$123
  Bottom 0.813: R55.2 78.11,147.96 T3.1
N$124
  Bottom 0.813: R56.2 86.36,158.75 T4.1
N$125
  Bottom 0.813: R57.2 46.35,150.5 T5.1
N$126
  Bottom 0.813: R58.2 54.61,139.7 T6.1
N$127
  Bottom 0.813: R59.2 52.7,135.89 45.72,128.91 T8.1
N$128  (via drill 0.7 pad 1.6)
  Top 1.27: v100.97,112.39 71.75,141.6 JP7.1
  Bottom 1.27: T7.2 v100.97,112.39
N$129  (via drill 0.7 pad 1.6)
  Top 1.27: JP7.2 69.22,140.48 103.65,106.05 107.95,106.05 107.95,116.84 107.31,117.47 102.87,117.47 98.42,121.92 v98.42,123.19
  Bottom 1.27: T1.2 v98.42,123.19
N$130  (via drill 0.7 pad 1.6)
  Top 1.27: v99.06,133.99 73.03,160.02 68.58,160.02 66.67,158.12 JP7.3
  Bottom 1.27: T2.2 v99.06,133.99
N$131  (via drill 0.7 pad 1.6)
  Top 1.27: v99.06,145.41 90.81,145.41 74.3,161.93 66.67,161.93 65.41,160.66 64.14,159.38 JP7.4
  Bottom 1.27: T3.2 v99.06,145.41
N$132  (via drill 0.7 pad 1.6)
  Top 1.27: JP7.5 61.59,160.02 65.41,163.83 76.2,163.83 83.82,156.21 v99.06,156.21
  Bottom 1.27: T4.2 v99.06,156.21
N$133  (via drill 0.7 pad 1.6)
  Top 1.27: v33.02,153.03 43.81,163.83 54.61,163.83 59.05,159.38 JP7.6
  Bottom 1.27: T5.2 v33.02,153.03
N$134  (via drill 0.7 pad 1.6)
  Top 1.27: v32.38,142.24 46.99,156.84 46.99,159.38 49.53,161.93 52.7,161.93 56.52,158.12 JP7.7
  Bottom 1.27: T6.2 v32.38,142.24
N$135  (via drill 0.7 pad 1.6)
  Top 1.27: JP7.8 53.98,157.48 52.07,159.38 50.16,159.38 49.53,158.75 49.53,149.22 v31.75,131.44
  Bottom 1.27: T8.2 v31.75,131.44
N$136  (via drill 0.7 pad 1.6)
  Top 0.813: v53.34,78.36 v53.34,68.58
  Bottom 0.813: IC8.14 49.53,88.9 53.34,85.09 v53.34,78.36 | v53.34,68.58 55.24,68.58 IC6.9
N$137
  Bottom 0.813: R61.1 IC8.1
N$138
  Bottom 0.813: IC8.2 R62.1
N$139
  Bottom 0.813: IC8.3 R63.1
N$140
  Bottom 0.813: R64.1 IC8.4
N$141
  Bottom 0.813: IC8.15 44.42,91.44 44.42,95.91 R60.1
N$142
  Bottom 0.813: IC8.5 R65.1
N$143
  Bottom 0.813: R66.1 IC8.6
N$144
  Bottom 0.813: R67.1 IC8.7
N$145
  Bottom 0.813: R60.2 29.84,96.52 JP8.1
N$146
  Bottom 0.813: R61.2 JP8.2
N$147
  Bottom 0.813: R62.2 JP8.3
N$148
  Bottom 0.813: R63.2 JP8.4
N$149
  Bottom 0.813: JP8.5 R64.2
N$150
  Bottom 0.813: R65.2 JP8.6
N$151
  Bottom 0.813: R66.2 JP8.7
N$152
  Bottom 0.813: JP8.8 R67.2
N$154  (via drill 0.7 pad 1.6)
  Top 0.813: v43.81,116.2 v43.81,76.2
  Bottom 0.813: v43.81,116.2 IC9.14 | IC8.9 v43.81,76.2
N$155
  Bottom 0.813: IC9.1 R69.1
N$156
  Bottom 0.813: R70.1 IC9.2
N$157
  Bottom 0.813: IC9.3 R71.1
N$158
  Bottom 0.813: R72.1 IC9.4
N$159
  Bottom 0.813: IC9.15 42.55,118.75 44.45,120.65 44.45,123.83 R68.1
N$160
  Bottom 0.813: IC9.5 R73.1
N$161
  Bottom 0.813: R74.1 IC9.6
N$162
  Bottom 0.813: IC9.7 R75.1
N$163
  Bottom 0.813: JP9.1 30.48,123.83 R68.2
N$164
  Bottom 0.813: R69.2 JP9.2
N$165
  Bottom 0.813: JP9.3 R70.2
N$166
  Bottom 0.813: R71.2 JP9.4
N$167
  Bottom 0.813: JP9.5 R72.2
N$168
  Bottom 0.813: R73.2 JP9.6
N$169
  Bottom 0.813: JP9.7 R74.2
N$170
  Bottom 0.813: R75.2 JP9.8
N$173
  Bottom 0.813: IC9.9 43.18,101.6 53.98,101.6 58.42,106.05 66.04,106.05 IC7.14
SHIFT  (via drill 0.7 pad 1.6)  (2 unrouted)
  Top 0.813: v41.91,52.7 41.91,16.51 49.53,8.89 v59.69,8.89 86.91,8.89 v87,8.8 114.21,8.8 v114.3,8.89 133.35,8.89 139.7,15.24 139.7,62.23 137.16,64.77 v115.57,64.77 v88.27,64.77 v61.59,64.77 53.98,64.77 49.53,69.22 v49.53,81.28 v49.53,108.58 50.16,109.22 v58.42,109.22
  Bottom 0.813: IC2.11 87,17.88 86.94,17.82 86.94,8.85 v87,8.8 | IC1.11 v59.69,8.89 | v114.3,8.89 IC3.11 | v115.57,64.77 IC4.11 | v61.59,64.77 IC6.11 | IC5.11 v88.27,64.77 | IC8.11 v49.53,81.28 | IC9.11 v49.53,108.58 | v58.42,109.22 IC7.11
STORE  (via drill 0.7 pad 1.6)  (2 unrouted)
  Top 0.813: v43.81,62.23 43.81,17.78 50.8,10.79 v62.23,10.79 v89.53,10.79 v116.84,10.79 132.08,10.79 137.79,16.51 137.79,60.33 135.25,62.87 v118.11,62.87 v90.81,62.87 v64.14,62.87 53.34,62.87 47.62,68.58 v47.62,83.82 v47.62,111.12 v60.96,111.12
  Bottom 0.813: v62.23,10.79 IC1.12 | v89.53,10.79 IC2.12 | v116.84,10.79 IC3.12 | v118.11,62.87 IC4.12 | v90.81,62.87 IC5.12 | v64.14,62.87 IC6.12 | IC9.12 v47.62,111.12 | IC8.12 v47.62,83.82 | IC7.12 v60.96,111.12
VCC  (via drill 0.7 pad 1.6)  (15 unrouted)
  Top 1.27: v38.73,69.85 v38.73,66.04
  Bottom 0.813: IC1.10 57.15,19.68 | 72.23,19.05 IC1.16 72.39,22.23 | 57.3,19.05 IC1.10 | 74.3,67.94 IC6.16 74.3,70.48 | IC2.16 99.69,22.23 | 40.64,121.28 IC9.16 40.01,121.28 | IC3.16 127,22.23 | IC1.10 57.15,22.23 | IC5.16 100.97,70.48 | IC8.16 38.1,93.98 | 44.45,13.97 52.7,22.23 | IC4.10 113.03,67.94
  Bottom 1.27: J1.1 36.83,64.14 v38.73,66.04 50.16,66.04 52.07,64.14 52.07,57.15 52.07,47.62 52.07,40.64 50.16,38.73 | 48.9,26.04 52.7,22.23 57.15,22.23 72.39,22.23 84.45,22.23 99.69,22.23 111.76,22.23 127,22.23 133.35,22.23 133.35,57.15 132.72,57.78 113.03,57.78 | 59.05,69.22 60.33,70.48 74.3,70.48 85.72,70.48 100.97,70.48 113.03,70.48 126.36,70.48 128.27,68.58 IC4.16 | 38.1,107.95 38.1,93.98 38.1,78.74 38.1,70.48 v38.73,69.85 | 40.01,106.05 38.1,107.95 | 40.01,121.28 38.1,119.38 38.1,107.95 | 50.8,106.05 51.44,106.68 51.44,117.47 55.88,117.47 69.85,117.47 71.12,116.2 IC7.16
(copper drawn outside any net)
  shapes: Top circle x9

## Text on the board
Top: 1 | 1 | 1 | 1 | 1 | 1 | 1 | LED-Cube BS 3AHET